# EAGLE board Adafruit VL53L0X.bak (EAGLE 9.2.2)
REV: B
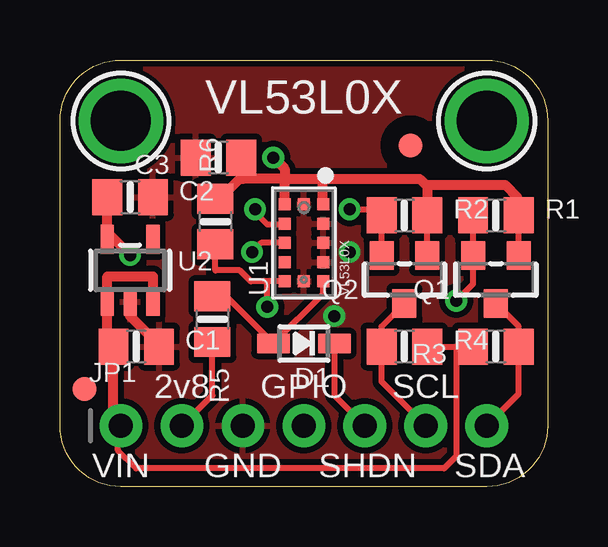
[diagram p0: board, top side]
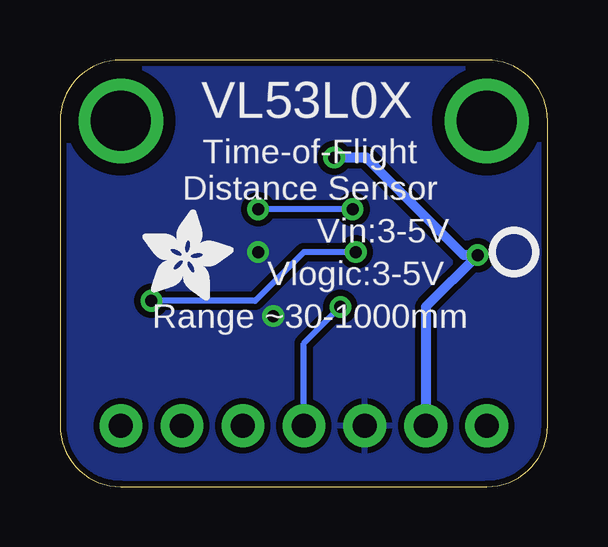
[diagram p1: board, bottom side, seen from below]

Size 20.32 x 17.78 mm. Coordinates in mm from the lower left corner, seen from the top.
Outline: 17.78,0 2.54,0 arc-90 0,2.54 0,15.24 arc-90 2.54,17.78 17.78,17.78 arc-90 20.32,15.24 20.32,2.54 arc-90 17.78,0
Copper layers (1*16): Top 0.035mm / dielectric 1.5mm / Bottom 0.035mm
Design rules "adafruit *": minimum track width 8mil, minimum drill 15.5mil, track to track 8mil, track to pad 8mil, pad to pad 8mil, via to via 8mil, smd to smd 8mil, copper to edge 10mil, drill to drill 8mil, minimum pad ring 10mil, minimum via ring 8mil, stop-mask expansion 2mil, vias tented up to drill 20mil, thermal gap 10mil

## Footprints (pad centres in the part's own frame; a part is rotated, then mirrored left to right if it is on the bottom)
0805-NO = smd 1.24 x 1.5: 1 -0.95,0; 2 0.95,0
SOD-323 = smd 1.35 x 0.8: A 1.27,0; C -1.27,0
FIDUCIAL_1MM = smd 1 x 1: 1 0,0
1X07_ROUND_70 = drill 1 pad 1.778: 1 -7.62,0; 2 -5.08,0; 3 -2.54,0; 4 0,0; 5 2.54,0; 6 5.08,0; 7 7.62,0
SOT23-WIDE = smd 1 x 1.2: 1 -0.95,-1; 2 0.95,-1; 3 0,1
LGA12_ST = smd 0.5 x 0.5: 1 1.6,-0.8; 2 0.8,-0.8; 3 0,-0.8; 4 -0.8,-0.8; 5 -1.6,-0.8; 6 -1.6,0; 7 -1.6,0.8; 8 -0.8,0.8; 9 0,0.8; 10 0.8,0.8; 11 1.6,0.8; 12 1.6,0
SOT23-5 = smd 0.55 x 1.2: 1 -0.95,-1.3; 2 0,-1.3; 3 0.95,-1.3; 4 0.95,1.3; 5 -0.95,1.3
MOUNTINGHOLE_2.5_PLATED = drill 2.5 pad 3.2: P$1 0,0

## Placement (x,y rotation side)
C1  10µF  [0805-NO]  3.17,5.84 0 top
C2  10µF  [0805-NO]  2.92,12.06 0 top
C3  0.1uF  [0805-NO]  6.6,13.72 180 top
D1  1N4148  [SOD-323]  10.16,5.97 180 top
FID2  FIDUCIAL""  [FIDUCIAL_1MM]  14.61,14.22 0 top
FID3  FIDUCIAL""  [FIDUCIAL_1MM]  1.02,4.06 0 top
JP1  [1X07_ROUND_70]  10.16,2.54 0 top
Q1  BSS138  [SOT23-WIDE]  18.16,8.64 180 top
Q2  BSS138  [SOT23-WIDE]  14.35,8.64 180 top
R1  10K  [0805-NO]  18.16,11.3 0 top
R2  10K  [0805-NO]  14.35,11.3 0 top
R3  10K  [0805-NO]  18.16,5.84 180 top
R4  10K  [0805-NO]  14.35,5.84 0 top
R5  10K  [0805-NO]  6.35,6.99 270 top
R6  10K  [0805-NO]  6.48,11.05 90 top
U1  VL53L0X  [LGA12_ST]  10.16,10.16 90 top
U2  MIC5225_2.8V  [SOT23-5]  2.92,9.02 0 top
U$12  [PCBFEAT-REV-040]  1.4,9.78 0 bottom
U$13  MOUNTINGHOLE2.5  [MOUNTINGHOLE_2.5_PLATED]  2.54,15.24 0 top
U$14  MOUNTINGHOLE2.5  [MOUNTINGHOLE_2.5_PLATED]  17.78,15.24 0 top
U$15  [ADAFRUIT_3.5MM]  16.89,7.75 0 bottom

## Library data of the parts
C1-C3 D1 JP1 Q1 Q2 R1-R6 U1 U2 U$12 U$15 = microbuilder
FID2 FID3 U$13 U$14 = microbuilder; BOM: EXCLUDE

## Nets
2.8V: C2.1 C3.1 JP1.2 Q1.1 Q2.1 R1.2 R2.2 R5.2 R6.2 U1.1 U1.11 U2.5
GND: C1.2 C2.2 C3.2 JP1.3 U1.2 U1.3 U1.4 U1.6 U1.12 U2.2
GPIO: JP1.4 R6.1 U1.7
SCL: JP1.6 Q2.3 R4.1
SCL_2.8V: Q2.2 R2.1 U1.10
SDA: JP1.7 Q1.3 R3.1
SDA_2.8V: Q1.2 R1.1 U1.9
VIN: C1.1 JP1.1 R3.2 R4.2 U2.1 U2.3
XSHUT: D1.C JP1.5
XSHUT_2.8V: D1.A R5.1 U1.5

## Tracks (layer width: path | path; a pad name or v marks a point on that pad's centre or on a via)
2.8V  (via drill 0.5)
  Top 0.254: Q1.1 R1.2 | Q2.1 R2.2 | JP1.2 6.35,3.81 R5.2
  Top 0.406: U1.11 9.36,12.66 | 9.36,12.66 9.53,12.83 | 9.53,12.83 10.79,12.83 | 10.79,12.83 10.92,12.7 10.92,11.8 U1.1 | 10.79,12.83 14.99,12.83 15.24,12.57 | 15.24,12.57 15.3,12.51 R2.2 | C3.1 7.55,12.89 | 7.55,12.89 6.6,11.94 6.54,11.94 R6.2 | 9.53,12.83 7.62,12.83 7.55,12.89 | U2.5 1.97,10.47 | 1.97,10.47 C2.1 | 1.97,10.47 1.92,10.41 2.16,10.41 v2.92,9.65 | v8.89,13.72 9.36,13.25 9.36,12.66 | 15.24,12.57 18.54,12.57 19.05,12.06 19.05,11.36 R1.2
  Bottom 0.406: JP1.2 5.08,7.49 v2.92,9.65 3.49,9.65 C3.1 v8.89,13.72
GND  (via drill 0.5)
  Top 0.406: U2.2 2.92,7.11 3.94,6.1 | 3.94,6.1 4.19,5.84 | C1.2 3.94,5.84 3.94,6.1
  other vias: 11.43,7.11 12.06,9.78
  pour Bottom (isolate 0.254): 0,17.78 20.32,17.78 20.32,0 0,0
  pour Top (isolate 0.254): 0,17.78 20.32,17.78 20.32,0 0,0
GPIO  (via drill 0.5)
  Top 0.254: U1.7 8.64,8.56 | R6.1 6.48,9.02 7.49,9.02 7.95,8.56 8.64,8.56 | v8.64,7.49 8.64,8.56
  Bottom 0.254: JP1.4 10.16,5.97 v8.64,7.49
SCL
  Top 0.254: JP1.6 13.4,4.38 R4.1 13.4,6.69 Q2.3
SCL_2.8V  (via drill 0.5)
  Top 0.254: Q2.2 R2.1 13.34,11.37 13.02,11.37 12.83,11.56 v12.06,11.56 | U1.10 9.32,10.92 8.64,10.92 8.13,11.43 v8.13,11.56
  Bottom 0.254: v8.13,11.56 v12.06,11.56
SDA
  Top 0.254: JP1.7 19.11,3.87 R3.1 19.11,6.69 Q1.3
SDA_2.8V  (via drill 0.5)
  Top 0.254: R1.1 Q1.2 17.21,8.45 v16.51,7.75 | U1.9 8.38,10.16 v8,9.78
  Bottom 0.254: v8,9.78 10.16,9.78 12.19,7.75 v16.51,7.75
VIN
  Top 0.254: R3.2 R4.2 16.51,5.84 16.51,1.27 16,0.76 3.17,0.76 2.41,1.52 2.41,2.41 JP1.1
  Top 0.406: JP1.1 2.23,2.85 C1.1 1.97,6.1 U2.1 1.97,8.76 3.87,8.76 U2.3
XSHUT
  Top 0.254: D1.C 11.43,3.81 JP1.5
XSHUT_2.8V
  Top 0.254: R5.1 6.92,7.93 D1.A 10.96,8.04 U1.5

## Text on the board
tPlace: VL53L0X | 2v8 | GPIO | SCL | VIN | GND | SHDN | SDA
bPlace: VL53L0X | Time-of-Flight / Distance Sensor | Vin:3-5V | Vlogic:3-5V | Range ~30-1000mm